# EAGLE board board (EAGLE 9.6.2)
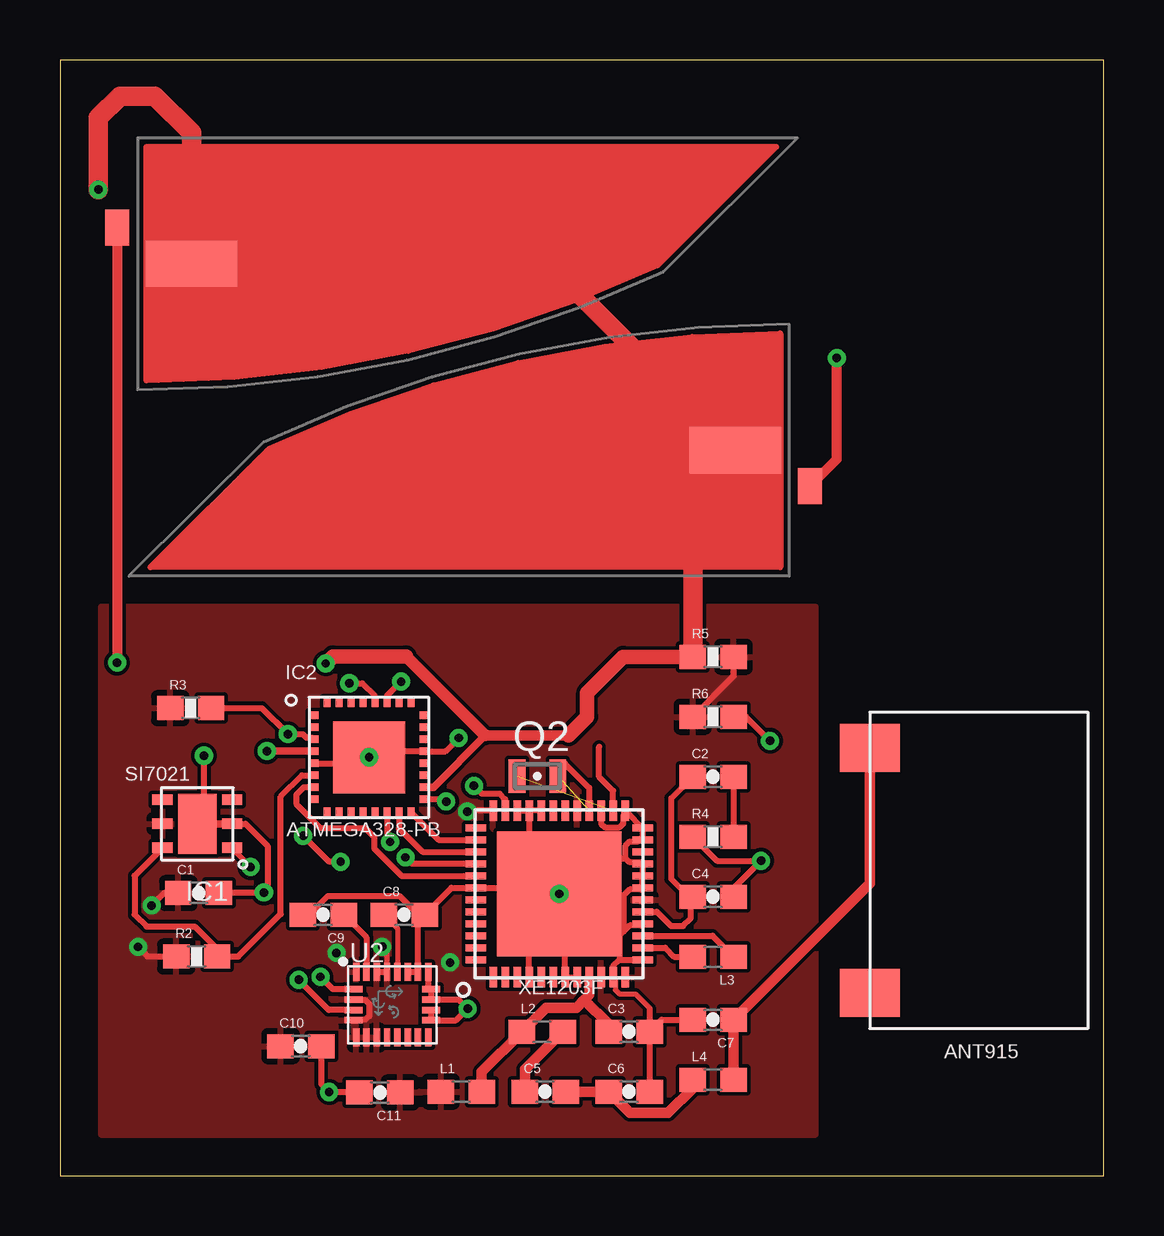
[diagram p0: board, top side]
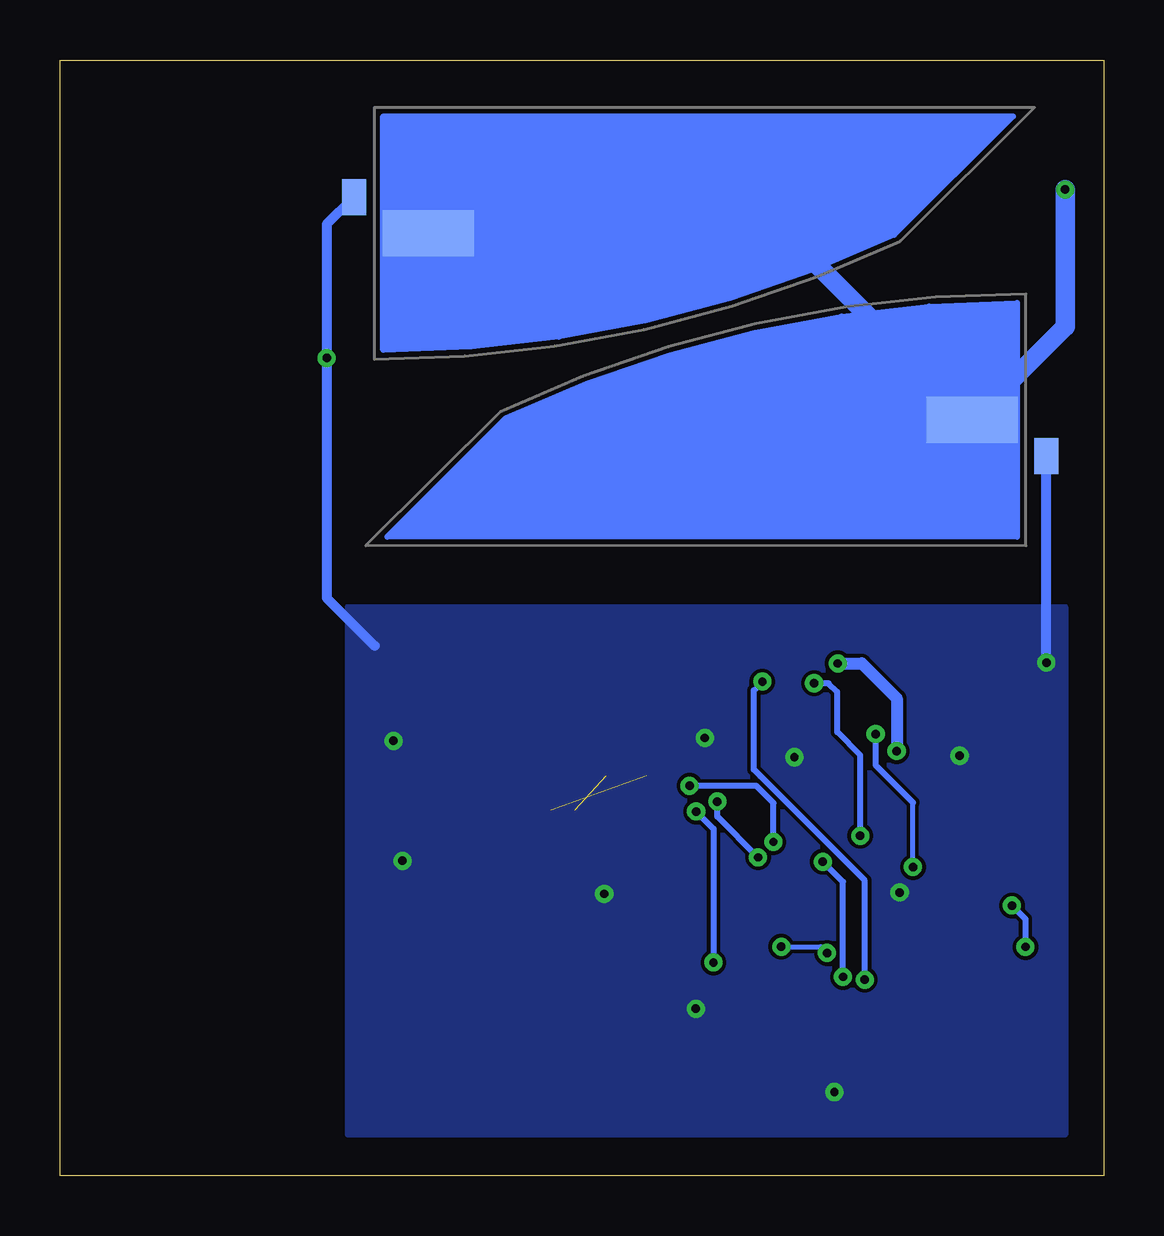
[diagram p1: board, bottom side, seen from below]

Size 43.5 x 46.5 mm. Coordinates in mm from the lower left corner, seen from the top.
Outline: 0,0 43.5,0 43.5,46.5 0,46.5 0,0
Copper layers (1*16): Top 0.035mm / dielectric 1.5mm / Bottom 0.035mm
Design rules "default": minimum track width 6mil, minimum drill 0.35mm, track to track 6mil, track to pad 6mil, pad to pad 6mil, via to via 6mil, smd to smd 6mil, copper to edge 40mil, drill to drill 6mil, minimum pad ring 10mil, minimum via ring 8mil, stop-mask expansion 4mil, vias tented up to drill 0mil, thermal gap 10mil

## Footprints (pad centres in the part's own frame; a part is rotated, then mirrored left to right if it is on the bottom)
ANT915 = smd 2 x 2.5: 1 -5.1,0; 2 5.1,0
0603-CAP = smd 1.1 x 1: 1 -0.85,0; 2 0.85,0
SI7021 = smd 0.85 x 0.45: 1 -1.45,1; 2 -1.45,0; 3 -1.45,-1; 4 1.45,-1; 5 1.45,0; 6 1.45,1 | smd 1.6 x 2.5: 7 0,0
ATMEGA328-PB = smd 0.4 x 0.3: 1 -2.3,1.75; 2 -2.3,1.25; 3 -2.3,0.75; 4 -2.3,0.25; 5 -2.3,-0.25; 6 -2.3,-0.75; 7 -2.3,-1.25; 8 -2.3,-1.75; 17 2.3,-1.75; 18 2.3,-1.25; 19 2.3,-0.75; 20 2.3,-0.25; 21 2.3,0.25; 22 2.3,0.75; 23 2.3,1.25; 24 2.3,1.75 | smd 0.3 x 0.4: 9 -1.75,-2.3; 10 -1.25,-2.3; 11 -0.75,-2.3; 12 -0.25,-2.3; 13 0.25,-2.3; 14 0.75,-2.3; 15 1.25,-2.3; 16 1.75,-2.3; 25 1.75,2.3; 26 1.25,2.3; 27 0.75,2.3; 28 0.25,2.3; 29 -0.25,2.3; 30 -0.75,2.3; 31 -1.25,2.3; 32 -1.75,2.3 | smd 3 x 3: 33 0,0
XE1203F = smd 0.85 x 0.3: 1 -3.475,2.75; 2 -3.475,2.25; 3 -3.475,1.75; 4 -3.475,1.25; 5 -3.475,0.75; 6 -3.475,0.25; 7 -3.475,-0.25; 8 -3.475,-0.75; 9 -3.475,-1.25; 10 -3.475,-1.75; 11 -3.475,-2.25; 12 -3.475,-2.75; 25 3.475,-2.75; 26 3.475,-2.25; 27 3.475,-1.75; 28 3.475,-1.25; 29 3.475,-0.75; 30 3.475,-0.25; 31 3.475,0.25; 32 3.475,0.75; 33 3.475,1.25; 34 3.475,1.75; 35 3.475,2.25; 36 3.475,2.75 | smd 0.3 x 0.85: 13 -2.75,-3.475; 14 -2.25,-3.475; 15 -1.75,-3.475; 16 -1.25,-3.475; 17 -0.75,-3.475; 18 -0.25,-3.475; 19 0.25,-3.475; 20 0.75,-3.475; 21 1.25,-3.475; 22 1.75,-3.475; 23 2.25,-3.475; 24 2.75,-3.475; 37 2.75,3.475; 38 2.25,3.475; 39 1.75,3.475; 40 1.25,3.475; 41 0.75,3.475; 42 0.25,3.475; 43 -0.25,3.475; 44 -0.75,3.475; 45 -1.25,3.475; 46 -1.75,3.475; 47 -2.25,3.475; 48 -2.75,3.475 | smd 5.2 x 5.2: 49 0,0
0603 = smd 1.1 x 1: 1 -0.85,0; 2 0.85,0
FC-12M = smd 0.7 x 1.4: 1 -0.85,0; 2 0.85,0
0603-RES = smd 1.1 x 1: 1 -0.85,0; 2 0.85,0
TRISOLX-T01 = smd 3.81 x 1.93: P$2 -2,5 | smd 1 x 1.5: P$3 1.1,3.5
LGA24-8X4 = smd 0.27 x 0.75: 1 -1.505,1.365; 6 -1.505,-1.365; 7 -1.075,-1.365; 8 -0.645,-1.365; 9 -0.215,-1.365; 10 0.215,-1.365; 11 0.645,-1.365; 12 1.075,-1.365; 13 1.505,-1.365; 18 1.505,1.365; 19 1.075,1.365; 20 0.645,1.365; 21 0.215,1.365; 22 -0.215,1.365; 23 -0.645,1.365; 24 -1.075,1.365 | smd 0.75 x 0.27: 2 -1.615,0.645; 3 -1.615,0.215; 4 -1.615,-0.215; 5 -1.615,-0.645; 14 1.615,-0.645; 15 1.615,-0.215; 16 1.615,0.215; 17 1.615,0.645

## Placement (x,y rotation side)
A1  ANT915  [ANT915]  33.75,12.71 270 top
C1  0.1 uF  [0603-CAP]  5.78,11.78 0 top
C2  22pF  [0603-CAP]  27.23,16.62 0 top
C3  1.8pF  [0603-CAP]  23.73,6 0 top
C4  1.2pF  [0603-CAP]  27.23,11.62 0 top
C5  33pF  [0603-CAP]  20.23,3.5 0 top
C6  3.3pF  [0603-CAP]  23.73,3.5 0 top
C7  2.2pF  [0603-CAP]  27.23,6.5 180 top
C8  10nF  [0603-CAP]  14.35,10.87 0 top
C9  0.1uF  [0603-CAP]  10.97,10.87 180 top
C10  0.1uF  [0603-CAP]  10.04,5.39 0 top
C11  10uF  [0603-CAP]  13.34,3.46 180 top
IC1  SI7021  [SI7021]  5.72,14.66 180 top
IC2  ATMEGA328-PB  [ATMEGA328-PB]  12.88,17.43 0 top
IC3  XE1203F  [XE1203F]  20.81,11.74 90 top
L1  47nH  [0603]  16.73,3.5 0 top
L2  10nH  [0603]  20.1,6 0 top
L3  6.8nH  [0603]  27.23,9.12 180 top
L4  8.2nH  [0603]  27.23,4 0 top
Q2  FC-12M  [FC-12M]  19.9,16.65 0 top
R2  10K  [0603-RES]  5.7,9.13 0 top
R3  10K  [0603-RES]  5.45,19.48 0 top
R4  10K  [0603-RES]  27.23,14.12 0 top
R5  2.2K  [0603-RES]  27.23,21.62 0 top
R6  3.3K  [0603-RES]  27.23,19.12 0 top
S1  TRISOLX-WING  [TRISOLX-T01]  3.48,43.01 180 top
S2  TRISOLX-WING  [TRISOLX-T01]  30.15,25.23 0 top
S3  TRISOLX-WING  [TRISOLX-T01]  30.15,44.28 180 bottom
S4  TRISOLX-WING  [TRISOLX-T01]  3.48,26.5 0 bottom
U2  LSM9DS1  [LGA24-8X4]  13.85,7.12 0 top

## Library data of the parts
A1 IC1-IC3 = Mini-Project
C1-C11 L1-L4 R2-R6 = SparkFun
Q2 = crystal
S1-S4 = TriSolX_QzQube
U2 = LSM9DS1; PROD_ID: IC-12536

## Nets
+3.3V: C1.1 C10.1 C11.1 IC1.5 IC3.10 IC3.12 IC3.18 IC3.29 IC3.36 L1.1 R2.1 R3.1 R5.2 R6.1 U2.1 U2.3 U2.5 U2.6 U2.7 U2.8 U2.22 U2.23
+5V: IC2.4 IC2.18 R5.1 S1.P$2 S2.P$2 S3.P$2 S4.P$2
GND: C1.2 C3.2 C4.2 C6.2 C7.2 C8.2 C9.2 C10.2 C11.2 IC1.2 IC1.7 IC2.5 IC2.21 IC2.33 IC3.4 IC3.7 IC3.8 IC3.11 IC3.13 IC3.16 IC3.19 IC3.20 IC3.21 IC3.23 IC3.24 IC3.25 IC3.27 IC3.32 IC3.33 IC3.34 IC3.42 IC3.49 R4.1 R6.2 S1.P$3 S2.P$3 S3.P$3 S4.P$3 U2.14 U2.15 U2.16 U2.17 U2.18 U2.19 U2.20
LFB: C2.1 C4.1 IC3.17
N$1: C2.2 R4.2
N$2: C3.1 IC3.9 L1.2 L2.1
N$3: IC2.7 IC3.41
N$4: C5.1 L2.2
N$5: IC2.14 IC3.35
N$6: C5.2 C6.1 L4.1
N$7: A1.1 C7.1 L4.2
N$8: C8.1 U2.21
N$10: IC3.15 L3.1
N$11: IC3.14 L3.2
N$12: IC3.26 Q2.1
N$13: IC3.28 Q2.2
N$14: IC2.15 IC3.39
N$15: IC2.16 IC3.38
N$16: IC2.17 IC3.40
N$17: C9.1 U2.24
SCL: IC1.6 IC2.6 R2.2
SCL1: IC2.28 U2.2
SDA: IC1.1 IC2.3 R3.2
SDA1: IC2.27 U2.4

## Tracks (layer width: path | path; a pad name or v marks a point on that pad's centre or on a via)
+3.3V  (via drill 0.35)
  Top 0.203: U2.22 13.63,9.33 v13.43,9.54
  Top 0.254: R5.2 28.07,20.82 R6.1 | U2.23 U2.22 | IC3.36 17.02,15.21 v16.98,15.17 | U2.3 12.25,7.32 12.73,7.32 12.89,7.16 12.89,6.65 12.73,6.49 12.25,6.49 U2.5 | C1.1 4.34,11.78 v3.82,11.26 | v3.25,9.53 3.65,9.13 R2.1
  Bottom 0.203: v13.43,9.54 11.79,9.54 v11.53,9.28
  Bottom 0.254: v16.98,15.17 16.26,14.45 v16.26,8.88 | v3.82,11.26 3.25,10.69 v3.25,9.53
  pour Top: 1.7,23.7 1.7,1.7 31.5,1.7 31.5,23.7
+5V  (via drill 0.35)
  Top 0.152: 26.38,28.45 S2.P$2
  Top 0.203: 15.53,16.18 15.56,16.18
  Top 0.305: IC2.18 15.53,16.18 | v8.62,17.7 10.57,17.7 IC2.4 | 15.56,16.18 17.73,18.34
  Top 0.432: 17.73,18.34 21.2,18.34
  Top 0.508: 14.43,21.64 17.73,18.34
  Top 0.61: 21.2,18.34 21.98,19.12 21.98,20.12 23.48,21.62 R5.1 | 14.43,21.64 11.38,21.64 v11.07,21.34
  Top 0.813: S2.P$2 20.37,38.01 S1.P$2 5.48,43.47 3.95,45 2.5,45 1.6,44.1 v1.6,41.1 | R5.1 26.38,28.45
  Bottom 0.508: v11.07,21.34 10.07,21.34 8.62,19.89 v8.62,17.7
  Bottom 0.813: v1.6,41.1 1.6,35.38 S4.P$2 13.26,39.28 S3.P$2
GND  (via drill 0.35)
  Top 0.203: IC3.11 23.16,8.17 23.16,7.74 23.33,7.57 23.99,7.57 24.57,6.98 24.57,6.95
  Top 0.254: IC3.25 23.63,15.15 | 23.63,15.15 IC3.24 24.29,14.12 | 24.29,14.12 IC3.23 | 23.58,13.22 23.74,13.06 24.21,13.06 IC3.21 IC3.20 IC3.19 24.21,11.92 23.74,11.92 23.5,11.68 23.5,10.18 | 23.58,13.22 23.58,13.76 23.74,13.92 24.08,13.92 24.29,14.12 | IC3.8 IC3.7 21.06,9.42 19.85,10.63 19.7,10.63 | C4.2 28.07,11.97 v29.23,13.12 27.38,13.12 R4.1 | IC3.27 22.56,14.66 22.71,14.51 23.33,14.51 23.49,14.67 23.49,15.01 23.63,15.15 | R6.2 28.6,19.12 v29.6,18.12 | C3.2 25.07,6.5 C7.2 | C3.2 C6.2 | IC2.5 12.63,17.18 IC2.33 13.13,17.68 IC2.21 16.07,17.68 v16.62,18.24 | C8.2 16.32,11.99 IC3.42 18.64,11.99 | C9.2 10.38,10.87 11.16,11.65 14.17,11.65 14.95,10.87 C8.2 | C10.2 10.89,3.81 v11.22,3.48 11.23,3.46 C11.2 | IC1.2 7.74,14.66 8.65,13.75 8.65,11.95 v8.5,11.8 6.64,11.8 C1.2 | IC1.7 6,14.94 v6,17.5 | C8.2 14.93,10.6 U2.19 U2.20 | U2.15 U2.14 16.52,6.47 v17,6.96 16.61,7.33 U2.16 U2.17 15.36,7.88 U2.18 | 18.64,11.99 20.56,11.99 IC3.49 | IC3.33 19.56,12.9 18.64,11.99 | IC3.11 23.06,8.73 23.32,8.99 | 23.32,8.99 IC3.13 | IC3.49 22.29,13.22 23.58,13.22 | IC3.4 19.56,10.49 19.7,10.63 | 19.7,10.63 IC3.49 | IC3.16 24.21,10.42 23.74,10.42 23.5,10.18 | 23.5,10.18 23.32,9.99 23.32,8.99 | IC3.32 IC3.33 | IC3.34 IC3.33 | 24.57,6.95 C3.2
  Top 0.305: IC1.2 IC1.7
  Top 0.406: S2.P$3 32.38,29.86 v32.38,34.08 | S1.P$3 v2.38,21.38
  Bottom 0.406: S3.P$3 32.38,39.65 v32.38,34.08 32.38,24.08 30.38,22.08 | v2.38,21.38 S4.P$3
  other vias: 12.88,17.43 20.81,11.74
  pour Bottom: 1.6,23.7 1.6,1.7 31.5,1.7 31.5,23.7
LFB
  Top 0.254: 26.3,11.54 C4.1 | C2.1 25.48,15.72 25.48,12.37 26.3,11.54 | IC3.17 24.88,10.99 25.47,10.4 25.98,10.4 26.3,10.72 26.3,11.54
N$1
  Top 0.254: C2.2 R4.2
N$2
  Top 0.396: IC3.9 22.06,7.53
  Top 0.406: 22.06,7.53 21.85,7.32
  Top 0.432: C3.1 22.88,6.29 21.85,7.32 21.53,7 20.25,7 L2.1 17.57,4.32 L1.2
N$3
  Top 0.254: IC2.7 10.16,16.18 9.85,15.87 9.85,15.49 10.85,14.49 12.72,14.49 13.1,14.12 13.1,13.63 14.22,12.51 14.22,12.49 14.23,12.49 IC3.41
N$4
  Top 0.432: C5.1 19.38,4.42 L2.2
N$5  (via drill 0.35)
  Top 0.254: IC2.14 13.63,14.03 v13.76,13.9 | v17.25,16.25 17.58,15.92 18.33,15.92 18.56,15.69 IC3.35
  Bottom 0.254: v13.76,13.9 13.76,15.53 14.47,16.25 v17.25,16.25
N$6
  Top 0.432: C5.2 C6.1 23.75,2.62 25.35,2.62 26.38,3.65 L4.1
N$7
  Top 0.432: L4.2 C7.1 33.75,12.17 A1.1
N$8
  Top 0.203: C8.1 14.06,10.3 U2.21
N$10
  Top 0.254: IC3.15 27.2,9.99 L3.1
N$11
  Top 0.254: IC3.14 25.23,9.49 25.6,9.12 L3.2
N$12  (1 unrouted)
  Top 0.254: IC3.26 23.06,16.04 22.48,16.62 22.48,17.86
N$13  (1 unrouted)
  Top 0.254: 21.05,17.16 22.06,16.16 IC3.28
N$14
  Top 0.254: IC2.15 14.13,14.46 15.11,13.49 IC3.39
N$15
  Top 0.254: IC2.16 15.78,13.99 IC3.38
N$16  (via drill 0.35)
  Top 0.254: IC3.40 14.68,12.99 v14.4,13.26 | v16.1,15.59 16,15.69 IC2.17
  Bottom 0.254: v14.4,13.26 16.1,14.96 v16.1,15.59
N$17
  Top 0.254: C9.1 12.78,9.92 U2.24
SCL
  Top 0.254: IC1.6 3.11,12.49 3.11,10.88 3.6,10.38 5.62,10.38 6.55,9.45 | R2.2 7.43,9.13 9.2,10.9 9.2,15.79 10.09,16.68 IC2.6
  Top 0.305: 6.55,9.45 R2.2
SCL1  (via drill 0.35)
  Top 0.254: U2.2 11.38,7.76 v10.86,8.28 | v11.7,13.08 11.22,13.08 v10.14,14.16 | v12.06,20.52 12.6,20.52 13.13,19.98 IC2.28
  Bottom 0.254: v10.86,8.28 10.86,12.24 v11.7,13.08 | v10.14,14.16 10.14,17.52 11.1,18.48 11.1,20.16 11.46,20.52 v12.06,20.52
SDA  (via drill 0.35, 0.35 pad 0.55)
  Top 0.2: IC1.1 7.17,13.63 v7.94,12.86
  Top 0.254: IC2.3 10.51,18.26 10.27,18.26 10.12,18.4 v9.5,18.4 8.41,19.48 R3.2
  Bottom 0.2: v7.94,12.86 7.94,15.54
  Bottom 0.254: 7.94,15.54 9.5,17.1 v9.5,18.4
SDA1  (via drill 0.35)
  Top 0.254: U2.4 11.21,6.91 v9.95,8.16 | v14.22,20.59 13.63,20 IC2.27
  Bottom 0.254: v9.95,8.16 9.95,12.3 14.31,16.65 14.58,16.92 14.58,20.23 v14.22,20.59